# Altium PCB PCB.PcbDoc
Units mil, origin at the board's own origin, x right, y up, seen from the top; angles counter-clockwise.
Board outline 1600 x 1600 mil, 2 copper layers (Top Layer, Bottom Layer); 32 components, 38 nets, 167 pads, 83 vias.
Unrouted connection lines stored in the file: 1.
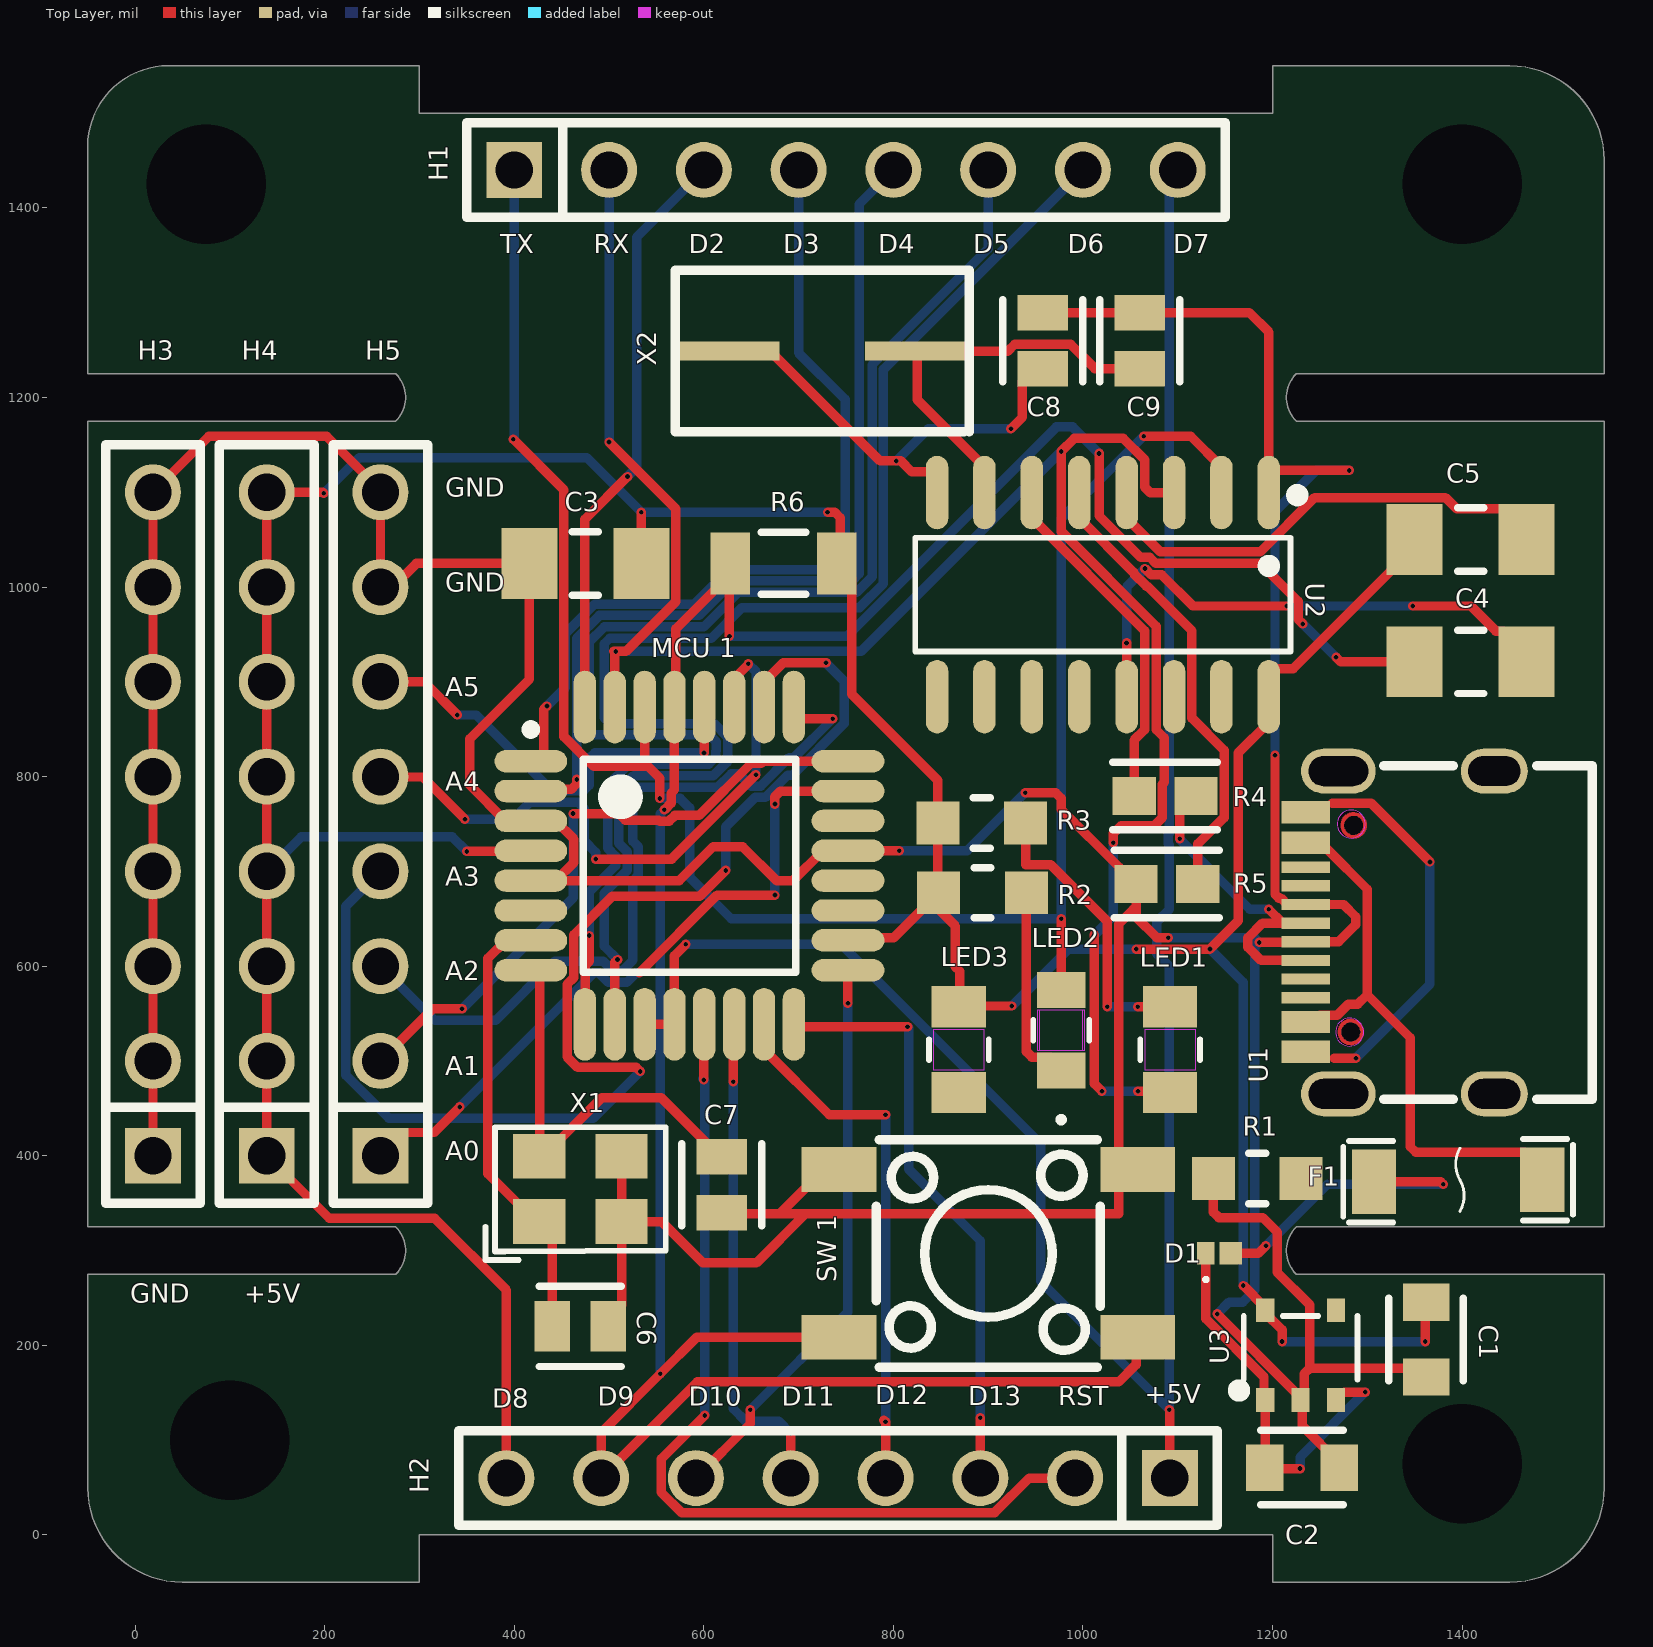
[diagram p0: Top Layer view]
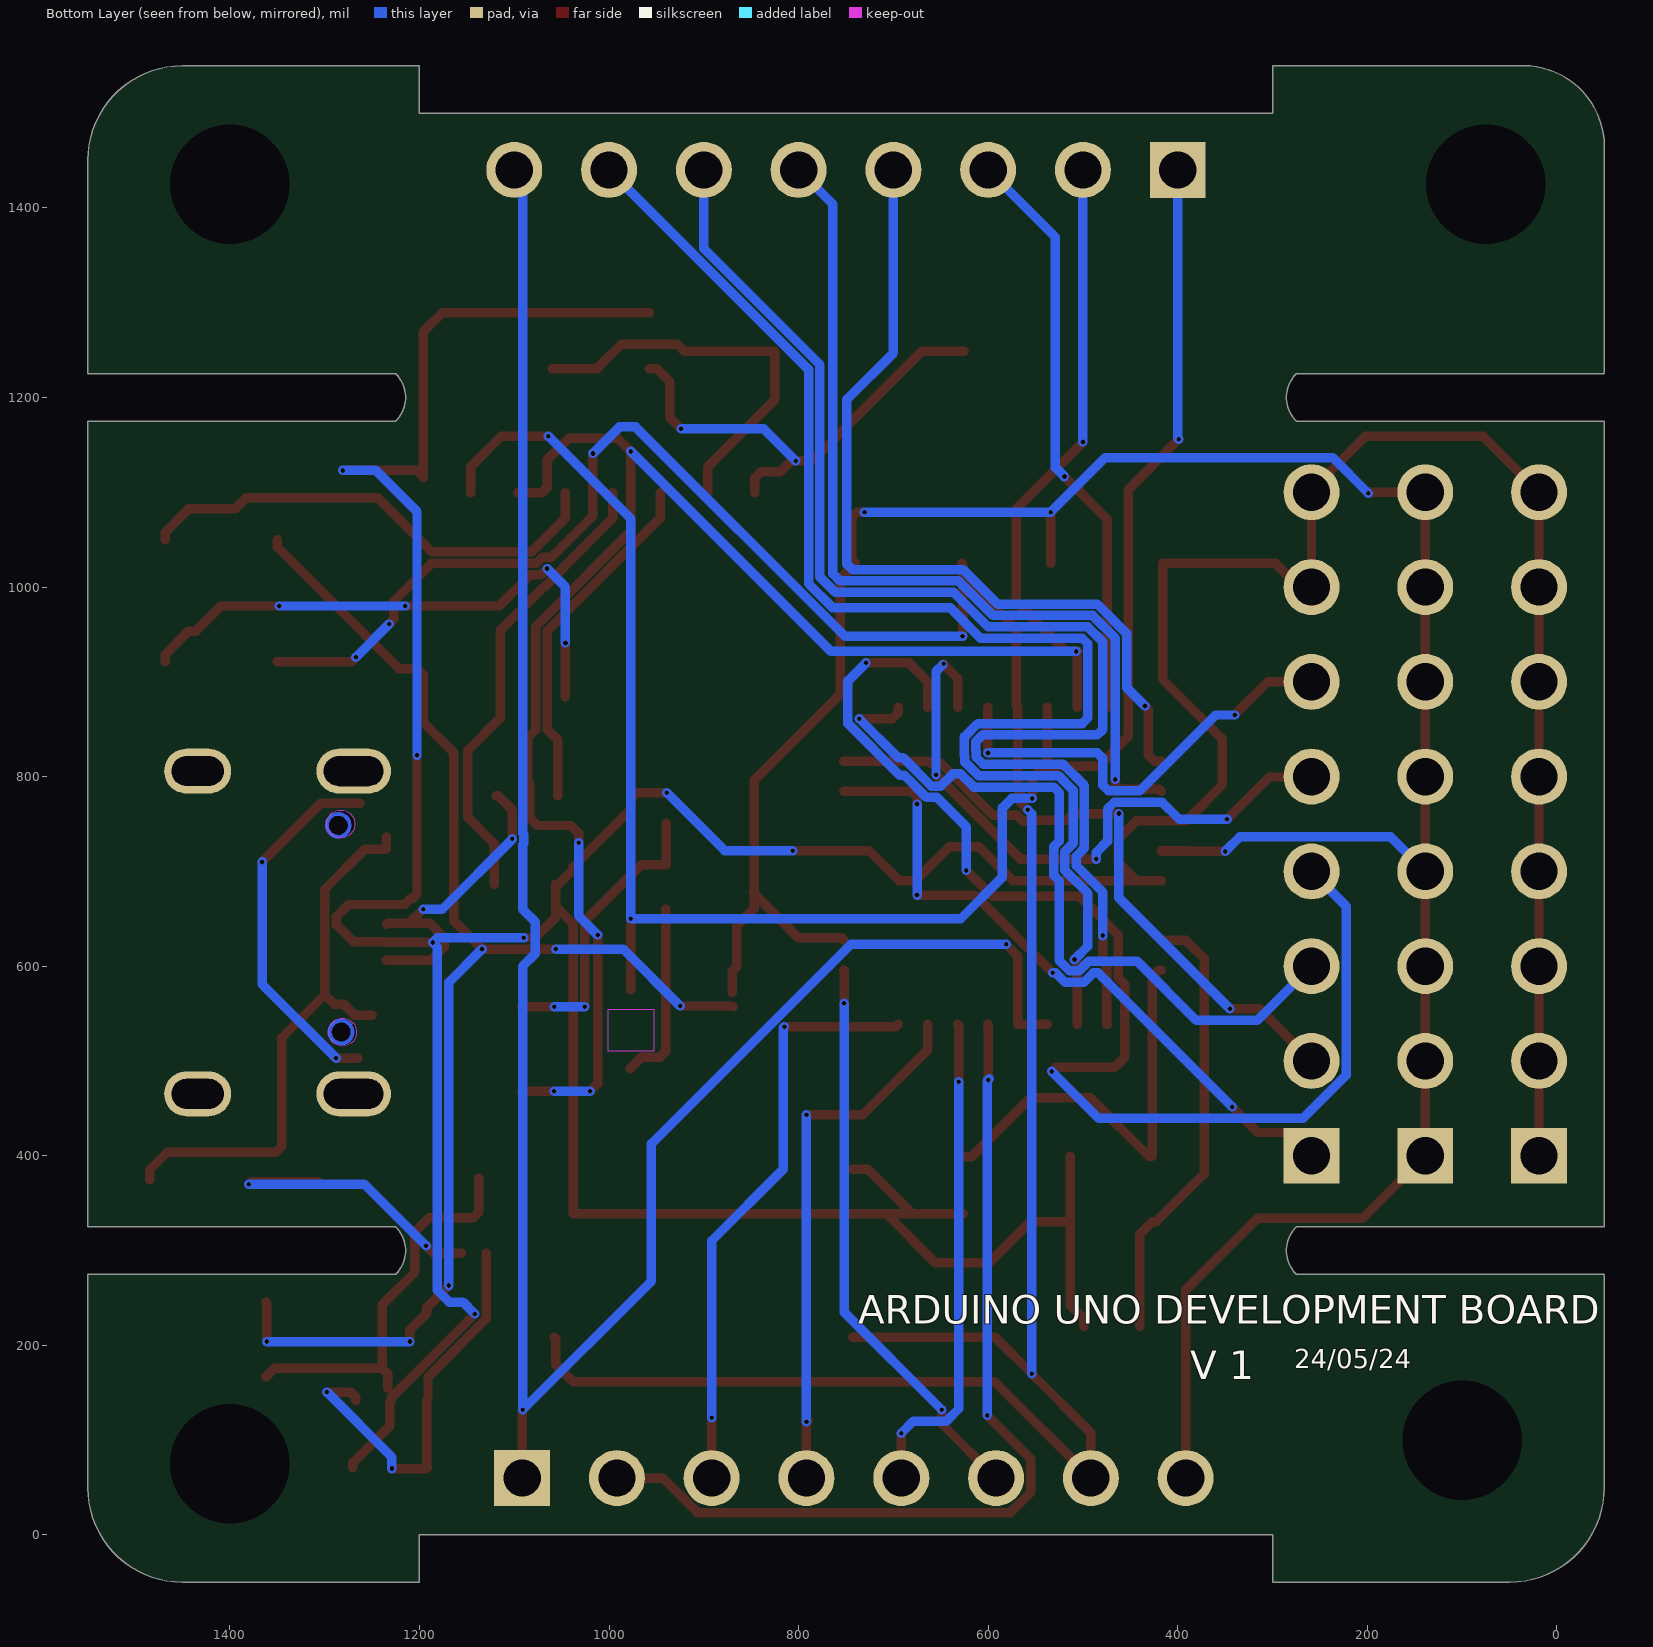
[diagram p1: Bottom Layer view, seen from below]
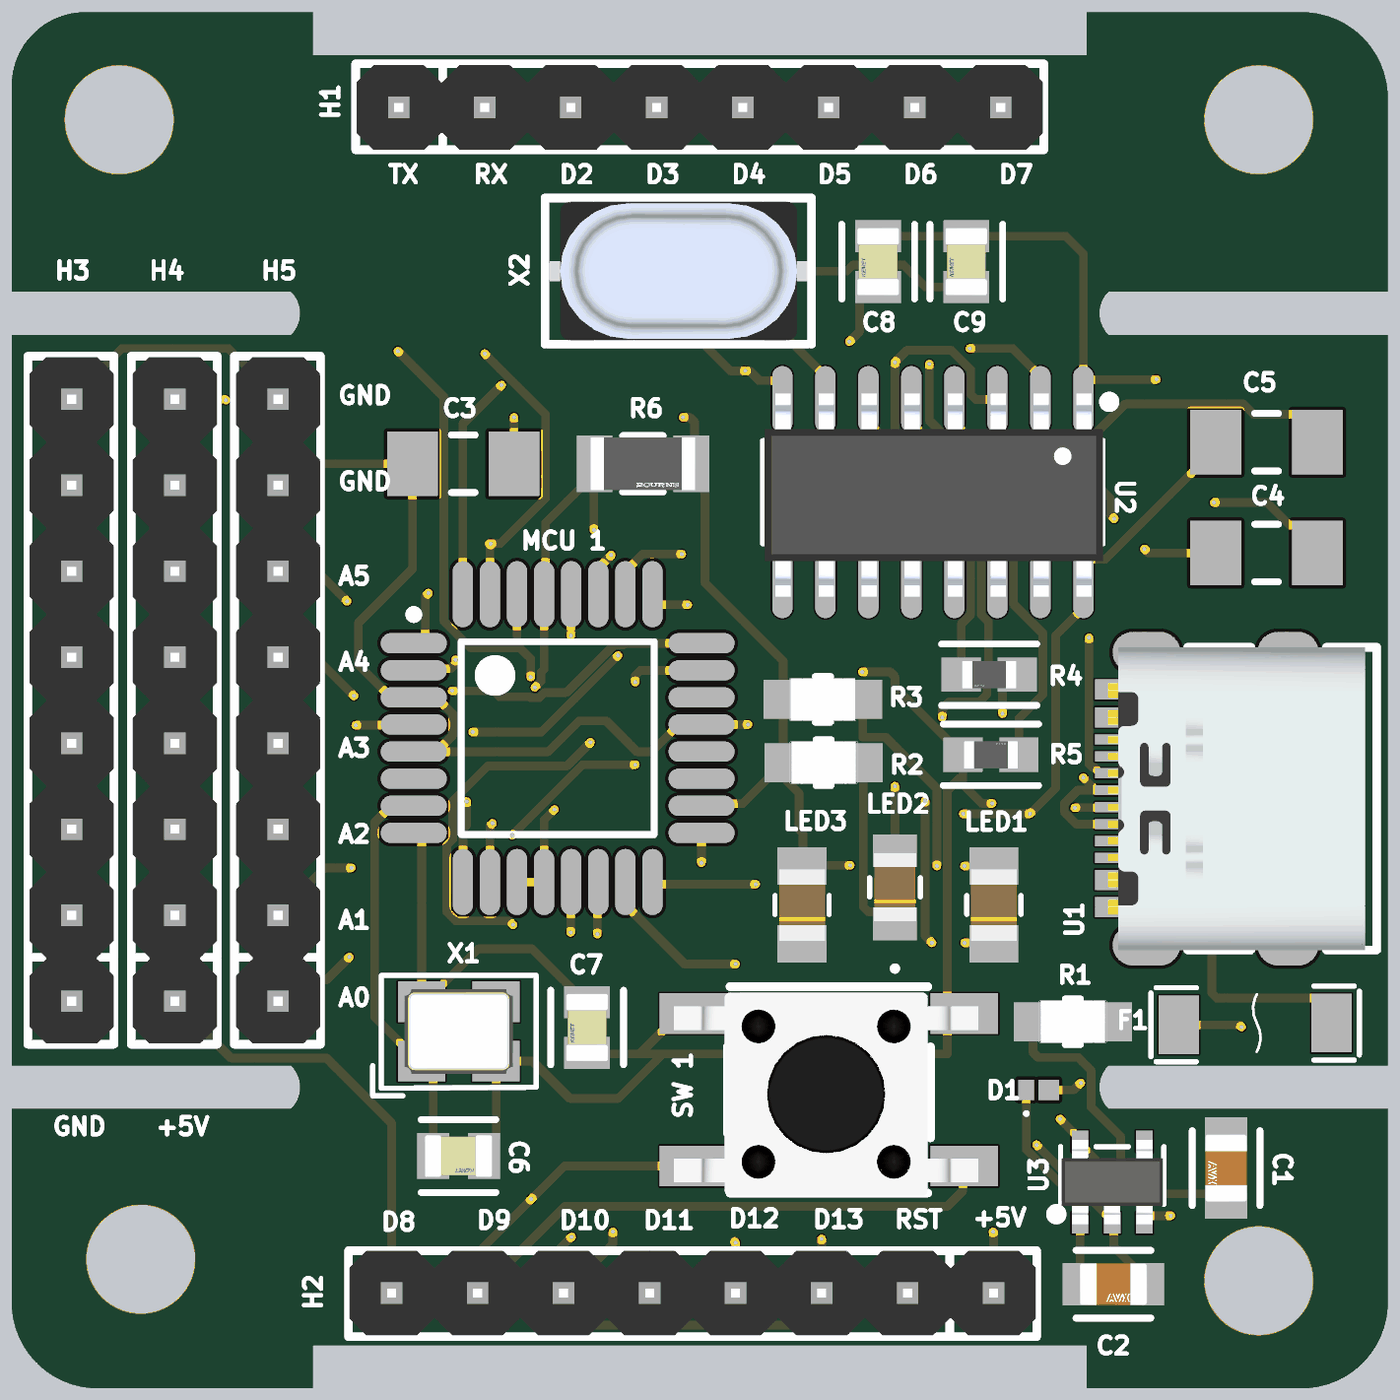
[diagram p2: 3D render of the assembled board from above, using the file's embedded part models]

## Layer stack, top to bottom
Top Solder: solder mask 0.4, Solder Resist, Dk 3.5
Top Layer: signal copper 1.4
Dielectric 1: dielectric 12.6, FR-4, Dk 4.8
Bottom Layer: signal copper 1.4
Bottom Solder: solder mask 0.4, Solder Resist, Dk 3.5

## Board outline
50,-50 cw(c50,50) -50,50 -50,275 275,275 ccw(c250,300) 275,325 -50,325 -50,1175 275,1175 ccw(c250,1200) 275,1225 -50,1225 -50,1464.64 cw(c35.36,1464.64) 35.36,1550 300,1550 300,1500 1200,1500 1200,1550 1450,1550 cw(c1450,1450) 1550,1450 1550,1225 1225,1225 ccw(c1250,1200) 1225,1175 1550,1175 1550,325 1225,325 ccw(c1250,300) 1225,275 1550,275 1550,50 cw(c1450,50) 1450,-50 1200,-50 1200,0 300,0 300,-50

## Design rules (kind name [scope] priority, off if disabled: settings)
Clearance [All] p1: gap=2 ignorepadtopadclearanceinfootprint=TRUE
PolygonConnect [All] p1: connectstyle=Relief reliefconductorwidth=10 reliefentries=4 polygonreliefangle="90 Angle" airgapwidth=10
RoutingVias [All] p1: holewidth=28 width=50 viastyle="Through Hole" minholewidth=28 minwidth=50 maxholewidth=28 maxwidth=50
SolderMaskExpansion [All] p1: expansion=4 istentingtop=FALSE
Width [All] p1: maxlimit=10 minlimit=10 preferedwidth=10
30 further rules are at their usual default settings.

## Classes and differential pairs
component class Sheet2: C1 C2 C4 C5 C6 C7 C8 C9 D1 F1 LED1 LED2 LED3 R1 R2 R3 R4 R5 U1 U2 U3 X1 X2
component class Sheet1: C3 H1 H2 H3 H4 H5 "MCU 1" R6 "SW 1"

## Components (designator, comment, footprint, x,y, rotation, side; value= is the part's Value field where it differs from the comment)
C1 "1uF" FP-0805-L_2_01_0_2-W_1_25-MFG 1362,206 r270 top
C2 "1uF" FP-0805-L_2_01_0_2-W_1_25-MFG 1231,71 r0 top
C3 "100nF" KEMT-1206-2_M 475,1025 r0 top
C4 "100nF" KEMT-1206-2_M 1409.06,921.14 r0 top
C5 "100nF" KEMT-1206-2_M 1409.06,1050 r180 top
C6 "22pF" FP-C0805C-DN-MFG 469.53,220 r180 top value="22 pF"
C7 "22pF" FP-C0805C-DN-MFG 619.03,369.53 r90 top value="22 pF"
C8 "22pF" FP-C0805C-DN-MFG 957.47,1260 r90 top value="22 pF"
C9 "22pF" FP-C0805C-DN-MFG 1060,1260 r90 top value="22 pF"
D1 "DIODE" ONSC-DSN-2-152AC-01_V 1144,297 r90 top
F1 "FUSE 50A" PCBComponent_1#1 1397,377.64 r180 top
H1 "8 PIN HEADER" PCBComponent_1#2 400,1440 r0 top
H2 "8 PIN HEADER" PCBComponent_1#2 1091.68,60 r180 top locked
H3 "8 PIN HEADER" PCBComponent_1#2 18.87,400 r90 top
H4 "8 PIN HEADER" PCBComponent_1#2 138.88,400 r90 top
H5 "8 PIN HEADER" PCBComponent_1#2 258.89,400 r90 top
LED1 "RX" LED_LSM0805-2P0X1P25X0P8_VCC 1092,511.94 r90 top
LED2 "TX" LED_05452V_VCC-M 977,532.51 r90 top
LED3 "ON" LED_LSM0805-2P0X1P25X0P8_VCC 869,511.94 r90 top
"MCU 1" "ATMEGA328P-AU" 32A_M 584.8,706 r0 top
R1 "470" FP-CR0805-MFG 1183.78,376.15 r0 top
R2 "470" FP-CR0805-MFG 894,677.47 r0 top
R3 "470" FP-CR0805-MFG 893.26,751 r0 top
R4 "22" FP-CR0603-IPC_A 1086.56,779.67 r180 top
R5 "22" FP-CR0603-IPC_A 1088.56,686.57 r0 top
R6 "10K" FP-CR1206-IPC_B 683.9,1025 r0 top
"SW 1" "RESET_SWITCH" PCBComponent_1#3 902,297 r180 top
U1 "USB C" PCBComponent_1#4 1536.6,460.55 r90 top
U2 "USB_INTERFACE" PCBComponent_1#5 1032,988.46 r180 top
U3 "5V_REGULATOR" PCBComponent_1#6 1223.69,194.05 r0 top
X1 "CRYSTALL OSCI" PCBComponent_1#7 469.76,360 r0 top
X2 "CRYSTALL OSCI" PCBComponent_1#8 725,1249 r180 top

## Footprints (in the part's own frame and the unit in brackets; to place one, negate y for a bottom-side part, rotate by r counter-clockwise, add the part's x,y. Pads: shape width x height; smd on the part's side, far side on the other; paste and mask are expansions set on the pad)
32A_M [mm] "Thin QFP, 32-Leads, Body 7x7mm, Pitch 0.8mm, IPC Low Density"
  oval 1.95x0.6 smd: 1(-4.25,2.8) 2(-4.25,2) 3(-4.25,1.2) 4(-4.25,0.4) 5(-4.25,-0.4) 6(-4.25,-1.2) 7(-4.25,-2) 8(-4.25,-2.8) 17(4.25,-2.8) 18(4.25,-2) 19(4.25,-1.2) 20(4.25,-0.4) 21(4.25,0.4) 22(4.25,1.2) 23(4.25,2) 24(4.25,2.8)
  oval 0.6x1.95 smd: 9(-2.8,-4.25) 10(-2,-4.25) 11(-1.2,-4.25) 12(-0.4,-4.25) 13(0.4,-4.25) 14(1.2,-4.25) 15(2,-4.25) 16(2.8,-4.25) 25(2.8,4.25) 26(2,4.25) 27(1.2,4.25) 28(0.4,4.25) 29(-0.4,4.25) 30(-1.2,4.25) 31(-2,4.25) 32(-2.8,4.25)
  silkscreen extent -4.37,-2.85 2.85,3.77, body extent -3.5,-3.5 3.5,3.5, height 1.2
FP-0805-L_2_01_0_2-W_1_25-MFG [mm]
  rect 1x1.25 smd paste+0 mask+0: 1(-1,0) 2(1,0)
  silkscreen extent -1.1,-1 1.1,1, body extent -1.6,-0.82 1.6,0.82, height 0.25
FP-C0805C-DN-MFG [mm]
  rect 0.95x1.35 smd paste+0 mask+0: 1(-0.75,0) 2(0.75,0)
  silkscreen extent -1.1,-1.07 1.1,1.07, body extent -1.4,-0.85 1.4,0.85, height 0.25
FP-CR0603-IPC_A [mil]
  rect 45.6x39.85 smd paste+0 mask+0: 1(-32.56,0) 2(32.56,0)
  silkscreen extent -55,-36 55,36, body extent -75,-40 75,40, height 10
FP-CR0805-MFG [mm]
  rect 1.15x1.15 smd paste+0 mask+0: 1(-1.175,0) 2(1.175,0)
  silkscreen extent -0.23,-0.67 0.23,0.67, body extent -1.85,-0.77 1.85,0.77, height 0.25
FP-CR1206-IPC_B [mil]
  rect 41.66x65.44 smd paste+0 mask+0: 1(-56.18,0) 2(56.18,0)
  silkscreen extent -24,-33 24,33, body extent -87,-43 87,43, height 10
KEMT-1206-2_M [mm] "SMD, 2-Leads, Body 3.4x1.8mm, IPC Low Density"
  rect 1.5x1.9 smd: 1(-1.5,0) 2(1.5,0)
  silkscreen extent -0.35,-0.85 0.35,0.85, body extent -1.7,-0.9 1.7,0.9, height 0.88
LED_05452V_VCC-M [mil]
  rect 38x51 smd paste+0 mask+0: 1(-42.5,0) 2(42.5,0)
  Top Layer keep-out region: -21.5,-22.5 -21.5,22.5 21.5,22.5 21.5,-22.5
  Keep-Out Layer region: -21.5,-24.5 -21.5,24.5 21.5,24.5 21.5,-24.5
  silkscreen extent -97,-30 11,30, body extent -39,-24 39,24, height 43
LED_LSM0805-2P0X1P25X0P8_VCC [mm]
  rect 1.1x1.45 smd paste+0 mask+0: 1(-1.15,0) 2(1.15,0)
  Top Layer keep-out region: -0.549,-0.674 -0.549,0.674 0.549,0.674 0.549,-0.674
  silkscreen extent -0.28,-0.8 0.28,0.8, body extent -1.05,-0.68 1.05,0.68, height 0.89
ONSC-DSN-2-152AC-01_V [mm] "DSN, 2-Leads, Body 1x0.6mm"
  rect 0.6x0.47 smd: 1(0,0.365)
  rect 0.6x0.6 smd: 2(0,-0.3)
  silkscreen extent -0.75,0.32 -0.65,0.41, body extent -0.3,-0.5 0.3,0.5, height 0.31
PCBComponent_1#1 [mil]
  rect 46.85x68.03 smd paste+0 mask+2: 1(-87.57,3.02) 2(90,5)
  silkscreen extent -120,-40 122,48, body extent -120,-50 120,52, height 97
PCBComponent_1#2 [mil] "HDR-TH_8P-P2.54-V-M"
  rect 59.05x59.05 hole 39.37 paste-99999 mask+2: 1(0,0)
  round 59.05 hole 39.37 paste-99999 mask+2: 2(100,0) 3(200,0) 4(300,0) 5(400,0) 6(500,0) 7(600,0) 8(700,0)
  silkscreen extent -50,-50 750,50, body extent -49,-50 749,48, height 312
PCBComponent_1#3 [mil] "SW-SMD_4P-L6.0-W6.0-P4.50-LS8.5"
  rect 78.74x47.24 smd paste+0 mask+2: 1(-155.63,88.58) 2(159.33,88.58) 3(-155.63,-88.58) 4(159.33,-88.58)
  silkscreen extent -116,-120 120,120, body extent -172,-113 182,123, height 197
PCBComponent_1#4 [mil] "USB-C_SMD-TYPE-C-31-M-12"
  oval 47.24x78.74 hole 31.5 slot 62.99 at 90 deg: 0(4.72,267.16) 1(345.28,267.16)
  oval 47.24x70.87 hole 31.5 slot 55.12 at 90 deg: 2(345.29,102.6) 3(4.71,102.6)
  rect 11.81x51.18 smd paste-3937.01 mask+2: A1(43.11,301.41) A4(74.61,301.41) A5(125.79,301.41) A6(165.16,301.41) A7(184.84,301.41) A8(224.2,301.41) A9(275.4,301.41) A12(307.89,301.41) B1(296.08,301.41) B4(263.58,301.41) B5(243.9,301.41) B6(204.53,301.41) B7(145.47,301.41) B8(106.1,301.41) B9(86.42,301.41) B12(54.92,301.41)
  Keep-Out Layer board cut-out: 304.21,253.56 302.74,259.97 298.65,265.1 292.73,267.95 286.16,267.95 280.23,265.1 276.14,259.97 274.68,253.56 274.68,253.56 276.14,247.15 280.23,242.02 286.16,239.16 292.73,239.16 298.65,242.02 302.74,247.15 304.21,253.56
  Keep-Out Layer board cut-out: 84.7,255.23 83.24,261.64 79.14,266.78 73.22,269.63 66.65,269.63 60.73,266.78 56.63,261.64 55.17,255.23 55.17,255.23 56.63,248.83 60.73,243.69 66.65,240.84 73.22,240.84 79.14,243.69 83.24,248.83 84.7,255.23
  Multi-Layer circle w4: c288,251 r12
  Multi-Layer circle w4: c70,254 r12
  silkscreen extent -1,-1 351,219, body extent -1,13 351,312, height 125
PCBComponent_1#5 [mil]
  oval 23.7x77.6 smd paste+0 mask+2: 1(-164.09,-111.2) 2(-114.09,-111.2) 3(-64.09,-111.2) 4(-14.09,-111.2) 5(35.91,-111.2) 6(85.91,-111.2) 7(135.91,-111.2) 8(185.91,-111.2) 9(185.91,104.2) 10(135.91,104.2) 11(85.91,104.2) 12(35.91,104.2) 13(-14.09,104.2) 14(-64.09,104.2) 15(-114.09,104.2) 16(-164.09,104.2)
  silkscreen extent -200,-114 209,56, body extent -187,-118 207,118, height 67
PCBComponent_1#6 [mil] "SOT-23-5_L3.0-W1.7-P0.95-LS2.8-BL"
  rect 19.29x25 smd paste+0 mask+2: 1(-31.49,-51.79) 2(5.91,-51.79) 3(43.31,-51.79) 4(43.31,43.09) 5(-31.49,43.09)
  silkscreen extent -65,-48 66,37, body extent -53,-53 65,45, height 43
PCBComponent_1#7 [mil] "CRYSTAL-SMD_4P-L3.2-W2.5-BL-1"
  rect 55.12x47.24 smd paste+0 mask+2: 1(-43.3,-29.45) 2(43.31,-29.45) 3(43.31,39.45) 4(-43.3,39.45)
  silkscreen extent -100,-70 90,70, body extent -63,-44 63,54, height 24
PCBComponent_1#8 [mil] "HC-49S_L11.4-W4.5-LS12.5"
  rect 110x20 smd paste+0 mask+2: 1(100,0) 2(-100,0)
  silkscreen extent -155,-85 155,85, body extent -150,-81 149,81, height 88

## Part data
C1 C2: library part CMP-2007-04692-2, "General Purpose Ceramic Capacitor, 0805, 1uF, 10%, X7R, 15%, 25V", Case Code (Imperial)=0805, Case Code (Metric)=2012, Dielectric=X7R, Dielectric Material=Ceramic, Max Operating Temperature=125°C, Min Operating Temperature=-55°C, Package Quantity=3000, Tolerance=10%, Voltage=25V, Capacitance=1uF, Case/Package=0805, Construction=Flat, Contact Plating=Tin, Depth=1.25mm, Height=1.4mm, Lead Free="Lead Free", Length=2.01mm, Mount="Surface Mount", Number of Pins=2, Packaging="Tape and Reel", Radiation Hardening=No, REACH SVHC="No SVHC", RoHS Compliant=Yes, Series=-, Termination=SMD/SMT, Thickness=0.037inch, Voltage Rating=25V, Voltage Rating (DC)=25V, Width=0.049inch
C3 C4 C5: library part CMP-1037-04202-2, "CAP, Ceramic, 0.1 uF, +/- 10%, 50 V, -55 to 125 degC, 1206 (3216 Metric), RoHS, Tape and Reel", Capacitance=0.1µF, Capacitance Tolerance=±10%, Capacitor Case Style=1206[3216Metric], Dielectric Characteristic=X7R, Manufacturer=Kemet, Operating Temperature Max=125degC, Operating Temperature Min=-55degC, Package Description="2-Leads SMD, Body 3.2 x 1.6 mm", Package Reference=1206-2, Voltage Rating=50V, Datasheet URL=https://datasheet.ciiva.com/6125/1725438-6125494.pdf, Datasheet Version=Jul-13, Manufacturer URL=http://www.kemet.com/, Packaging=Tape&Reel, Product Range=KEMET-CSeries, SVHC=ToBeAdvised
C6 C7 C8 C9: library part CMP-2007-00048-2, "Capacitor; Ceramic; Cap; 22.0pF; Tol 5%; SMT; Vol-Rtg 50V; C0G; Tape and Reel", Capacitance="22 pF", Manufacturer=KEMET, Manufacturer Part Number=C0805C220J5GACTU, Package=C0805C-DN, Temperature="-55°C to +125°C", Temperature Characteristic=C0G, Temperature Coefficient=30ppm/°C, Temperature Range High=+125°C, Temperature Range Low=-55°C, Tolerance=0.05, Voltage Rating="50 V", Automotive=No, Category=Cap, ComponentLink2Description=Datasheet, ComponentLink2URL=https://content.kemet.com/datasheets/KEM_C1003_C0G_SMD.pdf, Device Class L1="Passive Components", Device Class L2=Capacitors, Device Class L3="Ceramic Capacitors", Digikey Description="Capacitor; Ceramic; Cap; 22.0pF; Tol 5%; SMT; Vol-Rtg 50V; C0G; Tape and Reel", Height=0.88mm, Ipc Land Pattern Name=CAPC200125X78, Lead Free=Yes, Material=Ceramic, Mouser Description="Multilayer Ceramic Capacitors MLCC - SMD/SMT 50volts 22pF C0G 5%", Octopart=https://octopart.com/c0805c220j5gactu-kemet-145470, RoHS=TRUE
D1: library part CMP-1055-00232-1, "Schottky Barrier Diode, 2-Pin DSN, Pb-Free, Tape and Reel", Manufacturer="On Semiconductor", PartNumber=NSR05F40NXT5G, ComponentLink1Description="Manufacturer URL", ComponentLink1URL=http://www.onsemi.com/, ComponentLink2Description=Datasheet, ComponentLink2URL=http://www.onsemi.cn/pub_link/Collateral/NSR05F40.PDF, ComponentLink3Description="Package Specification", ComponentLink3URL=http://www.onsemi.cn/pub_link/Collateral/152AC.PDF, Configuration=Single, DatasheetVersion="Rev. 3", IFSM Max (A)=10, Mounting Technology="Surface Mount", PackageDescription="2-Pin Micro Molded Package, Body 1 x 0.6 mm", PackageReference=DSN-2-152AC-01, PackageVersion="Rev. C, 01/2011", Packing="Tape and Reel", RoHS=TRUE
F1 LED1 LED3 "SW 1" U1 U2 U3 X1 X2: library part Component_1
LED2: library part LSM0805452V, "No Description Available", Mfr_Name=VCC
"MCU 1": library part CMP-0095-00269-2, "8-bit AVR Microcontroller, 32KB Flash, 1KB EEPROM, 2KB SRAM, 32-pin TQFP, Industrial Grade (-40°C to 85°C)", Code_JEDEC=MS-026-ABA, ComponentLink1Description="Manufacturer URL", ComponentLink1URL=http://www.atmel.com/, ComponentLink2Description="ATmega48A/48PA/88A/88PA/168A/168PA/328/328P Datasheet", ComponentLink2URL=http://www.atmel.com/dyn/resources/prod_documents/doc8271.pdf, ComponentLink3Description="ATmega48A/48PA/88A/88PA/168A/168PA/328/328P Summary", ComponentLink3URL=http://www.atmel.com/dyn/resources/prod_documents/8271S.pdf, DatasheetVersion="revD, May-2011", PackageDescription="32-Lead, 7x7x1.0 mm Body, 0.8mm Lead Pitch, Thin Profile Plastic Quad Flat Package (TQFP)", PackageReference=32A, PackageVersion="revC, Oct-2010", RevisionNote="DatasheetVersion & PackageVersion updated. URLs added."
R1 R2 R3: library part CMP-07231-001047-1, "Thick Film Chip Resistors 0805 470Ω 0.125W 5% 200ppm/°C", Case Code (Imperial)=0805, Case Code (Metric)=2012, Max Operating Temperature=155°C, Min Operating Temperature=-55°C, Package Quantity=5000, Power Rating=125mW, Resistance=470R, Temperature Coefficient=200ppm/°C, Tolerance=5%, Voltage Rating=150V, Case/Package=0805, Composition="Thick Film", Contact Plating=Tin, Depth=1.25mm, Height=0.5mm, Lead Free="Contains Lead", Length=2mm, Military Standard=Not, Mount="Surface Mount", Number of Pins=2, Packaging="Tape and Reel", Radiation Hardening=No, REACH SVHC="No SVHC", Termination=SMD/SMT, Thickness=508um, Voltage Rating (DC)=150V, Width=1.25mm
R4 R5: library part CMP-07231-005384-1, "Thick Film Chip Resistors 0603 22Ω 0.1W 5% 200ppm/°C", Case Code (Imperial)=0603, Case Code (Metric)=1608, Max Operating Temperature=155°C, Max Power Dissipation=100mW, Min Operating Temperature=-55°C, Package Quantity=1, Resistance=22R, Temperature Coefficient=200ppm/°C, Tolerance=5%, Voltage Rating=50V, Case/Package=0603, Composition="Thick Film", Contact Plating=Tin, Depth=0.8mm, Features="Moisture Resistant", Height=0.022inch, Length=1.6mm, Military Standard=Not, Mount="Surface Mount", Number of Pins=2, Number of Terminations=2, Packaging="Tape and Reel", Power Rating=100mW, Radiation Hardening=No, REACH SVHC="No SVHC", Termination=SMD/SMT, Thickness=457um, Voltage Rating (DC)=50V, Width=0.8mm
R6: library part CMP-07231-005593-1, "Thick Film Chip Resistors 1206 10kΩ 0.25W 5% 200ppm/°C", Case Code (Imperial)=1206, Case Code (Metric)=3216, Max Operating Temperature=155°C, Max Power Dissipation=250mW, Min Operating Temperature=-55°C, Package Quantity=1, Resistance=10kR, Temperature Coefficient=200ppm/°C, Tolerance=5%, Voltage Rating=200V, Case/Package=1206, Composition="Thick Film", Contact Plating=Tin, Depth=1.6mm, Features="Moisture Resistant", Height=0.6mm, Length=3.2mm, Military Standard=Not, Mount="Surface Mount", Number of Pins=2, Number of Terminations=2, Packaging="Tape and Reel", Power Rating=250mW, Radiation Hardening=No, REACH SVHC="No SVHC", Termination=SMD/SMT, Thickness=610um, Voltage Rating (DC)=200V, Width=1.6mm

## Free pads (board coordinates)
  round 39.37 hole 125.98: 1(75,1425) 2(1400,1425) 3(100,100) 4(1400,75)

## Via types
v1: diameter 5, hole 5, Top Layer to Bottom Layer, 83 vias

## Nets (pads, with @x,y where several pads share a name; then routed paths per layer and width w, separated by ;. In a path a pad name is that pad's centre, name@x,y a point inside that pad or via, vN(x,y) a via of type N, cw(c..) or ccw(c..) an arc to the next point about the centre after c; other vN are vias at no path point)
NetC1_1: "MCU 1.4" "MCU 1.6" "MCU 1.18" C1.1 C3.2 C5.2 H2.8 H4.1 H4.2 H4.3 H4.4 H4.5 H4.6 H4.7 H4.8 LED3.2 R2.1 R3.1 R6.2 U2.16 U3.5 | length 4375.2
  Top Layer w10: v1(199,1099) 198,1100 H4.8 H4.7 H4.6 H4.5 H4.4 H4.3 H4.2 H4.1 204.88,334 316,334 391.68,258.32 H2.8 ; v1(350,721) 416.73,721 417.48,721.75 387.22,721.75 ; v1(534,1079) 534.06,1078.94 C3.2 ; v1(730.57,1079) 738.14,1079 744,1073.14 744,1028.92 R6.2 755.91,1009.17 755.91,887.09 847,796 R3.1 R2.1@847,677.47 ; 752.13,627.26 754.73,629.87 800.14,629.87 R2.1@847,676.73 ; R2.1 R2.1@847,676.73 ; LED3.2 869.79,558 v1(925,558) ; LED3.2@870,572.28 870,594.7 865.38,599.32 865.38,642.36 847,660.74 R2.1@847,676.73 ; v1(1056.27,618) v1(1134,618) 1163.73,647.73 1163.73,824.96 1196.09,857.32 U2.16 1196.09,907.5 1202.42,913.83 1221.71,913.83 1350,1042.13 C5.2 ; v1(1169,263) 1169.19,263 1192.2,239.99 U3.5 1192.2,234.29 1210,216.49 v1(1210,204) ; v1(1361,204) 1361,244.37 C1.1
  Bottom Layer w10: H4.4 175.41,736.53 334.47,736.53 v1(350,721) ; v1(199,1099) 236.53,1136.53 476.47,1136.53 v1(534,1079) v1(730.57,1079) ; v1(925,558) 985,618 v1(1056.27,618) ; v1(1134,618) 1169,583 v1(1169,263) ; v1(1210,204) v1(1361,204)
NetC1_2: "MCU 1.3" "MCU 1.5" "MCU 1.21" "SW 1.3" "SW 1.4" C1.2 C2.2 C3.1 C6.1 C7.1 C8.2 C9.2 H3.1 H3.2 H3.3 H3.4 H3.5 H3.6 H3.7 H3.8 H5.7 H5.8 R1.1 R5.1 U1.A6 U1.B6 U2.1 U3.2 X1.2 X1.3 | length 6126.8
  Top Layer w10: H3.1 H3.2 H3.3 H3.4 H3.5 H3.6 H3.7 H3.8 77.87,1159 202,1159 258.89,1102.11 H5.8 H5.7 271.87,1000 296.87,1025 C3.1 415.94,902.77 353,839.83 353,791.15 390.91,753.24 417.48,753.24 443.76,753.24 462.87,734.14 462.87,709.36 443.76,690.25 ; 417.48,690.25 443.76,690.25 ; C6.1 499.06,227.87 513.31,242.12 X1.2@513.31,330.55 ; X1.3@513.31,399.45 X1.2@513.31,330.55 ; C7.1@626.52,338.59 707.01,338.59 ; 681.34,340 726.92,385.58 742.67,385.58 ; v1(806.25,721.75) 752.13,721.75 725.55,721.75 694.06,690.25 676.72,690.25 640.97,726 609.78,726 574.03,690.25 443.76,690.25 ; v1(939,783) 971.14,783 977,777.14 977,765.57 1038.2,704.36 1038.2,701.49 1053.13,686.57 R5.1 1056,660 ; C8.2 C9.2 1175.47,1289.53 1196.09,1268.91 U2.1@1196.09,1116.67 ; v1(1090,630) 1078,630 1056,652 1056,660 ; R1.1 1137.52,340.62 1143.38,334.77 1189.71,334.77 1205,319.47 1205,277 1239.37,242.63 1239.37,176 ; v1(1141.64,233.07) 1229.6,145.11 U3.2 ; v1(1186,625) 1234.48,625 U1.A6 1269.71,625.71 1287.86,643.86 1287.86,652.14 1274.92,665.08 U1.B6 1215.51,665.08 1208.74,671.85 1206.7,671.85 1202.6,675.95 v1(1202.6,822.6) ; U2.1@1196.09,1115.28 U2.1@1196.09,1116.67 ; U3.2@1231.53,140.48 1231.53,114.76 1270.37,75.92 C2.2 ; U3.2@1233.51,154.6 1233.51,170.14 1239.37,176 ; v1(1281,1123) 1202.42,1123 U2.1@1196.09,1116.67 ; C1.2 1352.63,176 1239.37,176 ; X1.2@513.31,330.55 555.45,330.55 599,287 655.42,287 707.01,338.59 ; 707.01,338.59 1037.71,338.59 1037.71,644.59 1053.13,660 1056,660
  Bottom Layer w10: v1(806.25,721.75) 877.75,721.75 v1(939,783) ; v1(1090,630) 1181,630 v1(1186,625) 1181,620 1181,258.03 1168.52,245.55 1154.12,245.55 v1(1141.64,233.07) ; v1(1202.6,822.6) 1202.6,1079.6 1246,1123 v1(1281,1123)
NetC2_1: C2.1 D1.1 U3.1 U3.3 | length 434.9
  Top Layer w10: D1.1 1129.63,251.26 1129.64,228.1 1190.99,166.75 1190.99,143.47 U3.1 1192.2,71.57 C2.1 1192.63,70 v1(1229,70) ; U3.3 1267,145.11 1271.65,149.76 1274.5,149.76 1275.43,150.69 v1(1297.69,150.69)
  Bottom Layer w10: v1(1229,70) 1229,82 v1(1297.69,150.69)
NetC4_1: "MCU 1.29" "SW 1.1" "SW 1.2" C4.1 H2.7 R6.1 | length 2900.6
  Top Layer w10: v1(558.3,765) 558.71,765.41 558.88,765.41 565.5,772.03 565.5,782.5 569.06,786.06 569.06,873.32 570.61,874.88 570.61,956 R6.1@627,1012.39 ; v1(627,948) R6.1@627,1012.39 ; R6.1 627,1024.28 R6.1@627,1012.39 ; 742.67,208.42 592.42,208.42 v1(554,170) 491.68,107.68 H2.7 593.11,161.43 1037.71,161.43 1056,179.72 1056,206.79 1057.63,208.42 ; v1(1017,1141) 1017,1075.15 1060.71,1031.43 1070.4,1031.43 1076.83,1025 1186.97,1025 1227,984.97 1227,966 v1(1232,961) ; v1(1267,926) 1271.86,921.14 C4.1
  Bottom Layer w10: v1(554,170) 554,760.7 v1(558.3,765) ; v1(627,948) 751,948 972,1169 989,1169 v1(1017,1141) ; v1(1232,961) v1(1267,926)
NetC4_2: C4.2 U2.13 | length 591.3
  Top Layer w10: v1(1046,941) 1046.09,940.91 U2.13 ; v1(1065.43,1019.43) 1071.86,1013 1083,1013 1116,980 v1(1215,980) ; v1(1348,980) 1409.25,980 1435.71,953.54 1443.58,953.54 1468.11,929.02 C4.2
  Bottom Layer w10: v1(1046,941) 1046,1000 v1(1065.43,1019.43) ; v1(1215,980) v1(1348,980)
NetC5_1: C5.1 U2.4 | length 510.5
  Top Layer w10: U2.4 1046.09,1072.72 1081.8,1037 1187.03,1037 1244.44,1094.4 1382.43,1094.4 1394.43,1082.4 1443.58,1082.4 1468.11,1057.87 C5.1
NetC6_2: "MCU 1.7" C6.2 X1.1 | length 471.9
  Top Layer w10: 417.48,627.26 391.2,627.26 372.1,608.15 372.1,381.21 422.76,330.55 426.7,330.55 440,317.24 C6.2
NetC7_2: "MCU 1.8" C7.2 X1.4 | length 451.4
  Top Layer w10: 417.48,595.76 420.4,595.76 426.7,589.47 426.7,399.45 430.63,399.45 492.18,461 555.3,461 617.24,399.06 C7.2@625.11,399.06
NetC8_1: C8.1 U2.8 X2.1 | length 509.1
  Top Layer w10: X2.1 670,1249 786,1133 v1(803,1133) 807.87,1133 819.24,1121.63 839.76,1121.63 846.09,1115.3 U2.8 ; v1(924,1167) 935.9,1178.9 935.9,1216.77 949.6,1230.47 C8.1
  Bottom Layer w10: v1(803,1133) 837,1167 v1(924,1167)
NetC9_1: C9.1 U2.7 X2.2 | length 427.4
  Top Layer w10: U2.7 896.09,1126.61 825,1197.7 X2.2 920.82,1249 928,1256.17 986.94,1256.17 1012.65,1230.47 C9.1
NetD1_2: D1.2 F1.2 | length 328.5
  Top Layer w10: D1.2 1185,297 v1(1193,305) ; F1.2 1377.36,372.64 v1(1380,370)
  Bottom Layer w10: v1(1193,305) 1258,370 v1(1380,370)
NetF1_1: F1.1 U1.A9 U1.B4 U1.B9 | length 603.6
  Top Layer w10: U1.A9 U1.B4 1236.1,723.23 1257.81,723.23 1299.86,681.18 1299.86,569.93 ; U1.B9@1250,548.07 1268.07,548.07 1279.97,559.97 1289.89,559.97 1299.86,569.93 ; F1.1 1484.57,385.21 1466.14,403.64 1351.22,403.64 1345.36,409.5 1345.36,524.43 1299.86,569.93
NetH1_1: "MCU 1.30" H1.1 LED2.2 U2.2 | length 2086.1
  Top Layer w10: v1(399,1156) 452.47,1102.53 452.47,842.24 483.71,811 541,811 ; 537.56,873.32 537.56,814.44 541,811 ; v1(553.5,777) 553.5,798.5 541,811 ; LED2.2 v1(977,650) ; v1(1064,1159) 1113.7,1159 1146.09,1126.61 U2.2
  Bottom Layer w10: v1(399,1156) 400,1157 H1.1 ; v1(553.5,777) 575,777 585,767 585,694 629,650 v1(977,650) 977,1072 v1(1064,1159)
NetH1_2: "MCU 1.31" H1.2 LED1.1 U2.3 | length 2201
  Top Layer w10: v1(500,1153) 570.58,1082.42 570.58,984.7 517.88,932 505,932 506.06,930.94 506.06,873.32 ; v1(1012,633) 1012,476 v1(1020,468) ; v1(1032,730.09) 1032,740 1040.42,748.42 1075.38,748.42 1083.8,756.84 1083.8,791.8 1085.8,793.8 1085.8,840.95 1077.24,849.51 1077.24,958.54 977.24,1058.54 977.24,1142.76 v1(977,1143) 991,1157 1042.36,1157 1064.94,1134.42 1064.94,1105.52 1070.8,1099.66 U2.3 ; v1(1058,468) 1090.66,468 LED1.1
  Bottom Layer w10: v1(500,1153) H1.2 ; v1(506.97,932) 766,932 v1(977,1143) ; v1(1012,633) 1032,653 v1(1032,730.09) ; v1(1020,468) v1(1058,468)
NetH1_3: "MCU 1.32" H1.3 | length 618.6
  Top Layer w10: 474.57,873.32 474.57,1071.57 v1(519.51,1116.51)
  Bottom Layer w10: v1(519.51,1116.51) 529,1126 529,1369 H1.3
NetH1_4: "MCU 1.1" H1.4 | length 915.6
  Top Layer w10: 417.48,816.24 424.71,816.24 431,822.53 431,871 v1(434.5,874.5)
  Bottom Layer w10: v1(434.5,874.5) 454,894 454,951.05 484.95,982 590.06,982 626.44,1018.38 743.14,1018.38 749,1024.24 749,1198.05 700,1247.05 H1.4
NetH1_5: "MCU 1.2" H1.5 | length 972.3
  Top Layer w10: 417.48,784.74 419.31,786.57 460.14,786.57 466,792.43 v1(466,797)
  Bottom Layer w10: v1(466,797) 466,946.08 489.92,970 595.03,970 631.41,1006.38 756.17,1006.38 764,1014.21 764,1404 H1.5
NetH1_6: "MCU 1.9" H1.6 | length 1450.6
  Top Layer w10: 474.57,538.68 474.8,538.91 474.8,582.94 474.87,583 474.87,600.87 479,605 v1(479,632.29)
  Bottom Layer w10: v1(479,632.29) 479,678.03 507,706.03 507,715.97 498.43,724.54 498.43,790.51 520.92,813 605.19,813 612.55,820.36 612.55,826.58 613,827.03 613,836.97 605.97,844 484.86,844 479,849.86 479,942.11 494.89,958 600,958 636.38,994.38 761.14,994.38 777.51,1010.76 777.51,1234.49 900,1356.97 H1.6
NetH1_7: "MCU 1.10" H1.7 | length 1481.6
  Top Layer w10: 506.06,538.68 506.06,604.06 v1(509,607)
  Bottom Layer w10: v1(509,607) 494.97,621.03 494.97,677.03 519,701.06 519,720.94 510.43,729.51 510.43,785.54 525.89,801 610.16,801 624.55,815.39 624.55,821.61 625,822.06 625,841.94 610.94,856 500.83,856 494.97,861.86 494.97,940.14 500.83,946 608.03,946 640.27,978.24 764.24,978.24 789.51,1003.51 789.51,1229.51 H1.7
NetH1_8: "MCU 1.11" "MCU 1.12" H1.8 H2.1 | length 2314.7
  Top Layer w10: 537.56,538.68 569.06,538.68 569.06,611.06 v1(581,623) ; v1(1091,132) 1091.68,131.32 H2.1
  Bottom Layer w10: v1(581,623) 744.97,623 955.49,412.49 955.49,267.51 v1(1091,132) 1091,600.03 1078,613.03 1078,646.97 1091,659.97 1091,728.03 1090,729.03 1090,738.97 1091,739.97 1091,1431 H1.8
NetH2_2: "MCU 1.13" H2.2 | length 975.4
  Top Layer w10: v1(600,480) 600,538.12 600.55,538.68 ; v1(601,126) 555.16,80.16 555.16,44.87 576.55,23.47 906.81,23.47 943.34,60 H2.2
  Bottom Layer w10: v1@599,481 v1(600,480) 601,479 v1(601,126)
NetH2_3: "MCU 1.16" H2.3 | length 628.8
  Top Layer w10: 695.04,538.68 697.72,536 v1(815,536) ; H2.3 v1(891.68,123.68)
  Bottom Layer w10: v1(815,536) 816,535 816,386 891.68,310.32 v1(891.68,123.68)
NetH2_4: "MCU 1.15" H2.4 | length 568.9
  Top Layer w10: 663.54,538.68 663.54,512.1 732.33,443.32 v1(791.68,443.32) ; v1@790,121 v1(791.68,119.32) H2.4
  Bottom Layer w10: v1(791.68,119.32) v1(791.68,443.32)
NetH2_5: "MCU 1.14" H2.5 | length 527.1
  Top Layer w10: v1(631,478) 631,537.63 632.05,538.68 ; v1@690,109 v1(691.68,107.32) H2.5
  Bottom Layer w10: v1(631,478) 631,133.03 644.03,120 679,120 v1(691.68,107.32)
NetH2_6: "MCU 1.17" H2.6 | length 602.2
  Top Layer w10: H2.6 649,117.32 v1(649,132) ; v1(752,561) 752,595.64 752.13,595.76
  Bottom Layer w10: v1(649,132) 752,235 v1(752,561)
NetH5_1: "MCU 1.23" H5.1 | length 721.7
  Top Layer w10: H5.1 283.42,424.53 315.53,424.53 v1(342.5,451.5) ; v1(532,593) 614,675 v1(675,675) ; v1(675,771.09) 675,778.88 680.86,784.74 752.13,784.74
  Bottom Layer w10: v1(342.5,451.5) 484,593 489.06,593 499.06,583 518.94,583 528.94,593 v1(532,593) ; v1(675,675) v1(675,771.09)
NetH5_2: "MCU 1.24" H5.2 | length 683
  Top Layer w10: H5.2 313.89,555 v1(345,555) ; v1(462,761) 510.22,761 517.22,754 552.33,754 553.33,753 563.44,753 569.44,759 595.03,759 650.07,814.04 660.57,814.04 662.76,816.24 752.13,816.24
  Bottom Layer w10: v1(345,555) 462,672 v1(462,761)
NetH5_3: "MCU 1.25" H5.3 | length 809.6
  Top Layer w10: 695.04,873.32 695.04,867.29 701.33,861 v1(736,861)
  Bottom Layer w10: H5.3 315.89,543 380.6,543 442.6,605 494.03,605 504.03,595 513.97,595 525,606.03 525,690.09 531,696.09 531,725.91 525,731.91 525,783.14 530.86,789 615.13,789 628.98,802.85 637.27,802.85 650.07,790.04 660.02,790.04 689.97,820 695,820 v1(736,861)
NetH5_4: "MCU 1.26" H5.4 | length 1372.1
  Top Layer w10: v1(533,489) 528.71,493.29 466.78,493.29 455.76,504.31 455.76,580.86 462.87,587.97 462.87,633.13 503.3,673.57 595.57,673.57 v1(623,701) ; 663.54,873.32 663.54,899.9 683.65,920 v1(729,920)
  Bottom Layer w10: H5.4 222.37,663.47 222.37,484.87 267.74,439.5 483.5,439.5 v1(533,489) ; v1(623,701) 623,746.97 654.07,778.04 664.99,778.04 688.44,801.5 693.47,801.5 748,856.03 748,901 v1(729,920)
NetH5_5: "MCU 1.27" H5.5 | length 678.7
  Top Layer w10: H5.5 259.32,799.58 303.42,799.58 v1(348,755) ; v1(486,713) 566,713 v1(655.04,802.04) ; 632.05,873.32 632.05,903.58 647,918.54 v1(647,919)
  Bottom Layer w10: v1(348,755) 398.49,755 416.49,773 466.97,773 474,765.97 474,732 486,720 v1(486,713) ; v1@648,918 655.04,910.96 v1(655.04,802.04)
NetH5_6: "MCU 1.28" H5.6 | length 470.5
  Top Layer w10: H5.6 305,900 v1(340,865) ; v1(600.22,825) 600.22,872.99 600.55,873.32
  Bottom Layer w10: v1(340,865) 359.99,865 439.99,785 473.14,785 479,790.86 479,819.11 484.89,825 v1(600.22,825)
NetLED1_2: LED1.2 R3.2 | length 311.5
  Top Layer w10: R3.2 939.52,707.11 965.8,707.11 1025.71,647.19 v1(1025.71,557.21) ; v1(1057.79,557.21) LED1.2
  Bottom Layer w10: v1(1025.71,557.21) v1(1057.79,557.21) v1@1058,557
NetLED2_1: LED2.1 R2.2 | length 194.9
  Top Layer w10: R2.2@940.26,660 940.26,509.87 946.12,504.01 965.58,504.01 LED2.1@977.59,492
NetR4_1: R4.1 U1.A7 U1.B7 | length 343.3
  Top Layer w10: v1(1102,734.36) 1102,764.74 1116.92,779.67 R4.1 ; v1(1196,660) U1.A7@1210.61,645.39 ; U1.A7@1234.29,644.49 1233.38,645.39 U1.A7@1210.61,645.39 ; U1.B7 1188.01,606.02 1174,620.03 1174,629.97 1189.42,645.39 U1.A7@1210.61,645.39
  Bottom Layer w10: v1(1102,734.36) 1102,734 1176,660 v1(1196,660)
NetR4_2: R4.2 U2.6 | length 373.8
  Top Layer w10: U2.6 946.09,1072.72 1064.94,953.86 1064.94,849.51 1054,838.57 R4.2
NetR5_2: R5.2 U2.5 | length 488.4
  Top Layer w10: U2.5 996.09,1072.72 1053.43,1015.37 1053.43,1014.46 1066.89,1001 1067.8,1001 1114.94,953.86 1114.94,861.81 1148.92,827.83 1148.92,756.84 1121.12,729.05 R5.2
NetU1_A1: U1.A1 U1.A12 | length 390.7
  Top Layer w10: 1263.22,771.76 1304.24,771.76 v1(1366,710) ; 1265,503 v1(1288,503)
  Bottom Layer w10: v1(1288,503) 1366,581 v1(1366,710)
NetU1_B1: U1.B1
pads on no net: "MCU 1.19" "MCU 1.20" "MCU 1.22" LED3.1 R1.2 U1.0 U1.1 U1.2 U1.3 U1.A4 U1.A5 U1.A8 U1.B5 U1.B8 U1.B12 U2.9 U2.10 U2.11 U2.12 U2.14 U2.15 U3.4

## Silkscreen, mask and mechanical layers (free items; w line width, h text height)
Top Overlay:
  text "TX" at 385,1352 h20
  text "RX" at 484,1352 h20
  text "D2" at 584,1352 h20
  text "D3" at 684,1352 h20
  text "D4" at 784,1352 h20
  text "D5" at 884,1352 h20
  text "D6" at 984,1352 h20
  text "D7" at 1095,1352 h20
  text "GND" at 327,1095 h20
  text "GND" at 327,995 h20
  text "A5" at 327,885 h20
  text "A4" at 327,785 h20
  text "A3" at 327,685 h20
  text "A2" at 327,585 h20
  text "A1" at 327,485 h20
  text "A0" at 327,395 h20
  text "GND" at -5,245 h20
  text "+5V" at 115,245 h20
  text "+5V" at 1065,139 h20
  text "D12" at 781,138 h20
  text "D13" at 879,137 h20
  text "RST" at 974,137 h20
  text "D9" at 488,136 h20
  text "D10" at 584,136 h20
  text "D11" at 682,136 h20
  text "D8" at 377,134 h20
Bottom Overlay:
  text "ARDUINO UNO DEVELOPMENT BOARD" at 737,223 h30
  text "24/05/24" at 277,175.86 h20
  text "V 1" at 386.68,164.16 h30
Mechanical 1:
  circle w2: c1400,1425 r75
  circle w2: c1400,75 r75
  circle w2: c100,100 r75
  circle w2: c75,1425 r75
  lines w2: -50,50 ccw(c50,50) 50,-50 300,-50 300,0 550,0 950,0 1200,0 1200,-50 1450,-50 ccw(c1450,50) 1550,50 1550,275 1225,275 cw(c1250,300) 1225,325 1550,325 1550,1175 1225,1175 cw(c1250,1200) 1225,1225 1550,1225 1550,1450 ccw(c1450,1450) 1450,1550 1200,1550 1200,1500 950,1500 550,1500 300,1500 300,1550 35.36,1550 ccw(c35.36,1464.64) -50,1464.64 -50,1225 37.5,1225 212.5,1225 275,1225 cw(c250,1200) 275,1175 -50,1175 -50,325 275,325 cw(c250,300) 275,275 -50,275 -50,50